# Altium PCB GATEWAY_PCB.PcbDoc (part 2 of 2)
Units mm, origin at the board's own origin, x right, y up, seen from the top; angles counter-clockwise.
Board outline 98.58 x 95.81 mm, 4 copper layers (SIGNAL_TOP, GND, POWER, SIGNAL_BOTTOM), stack 0.603 mm thick; 207 components, 120 nets, 669 pads, 510 vias.
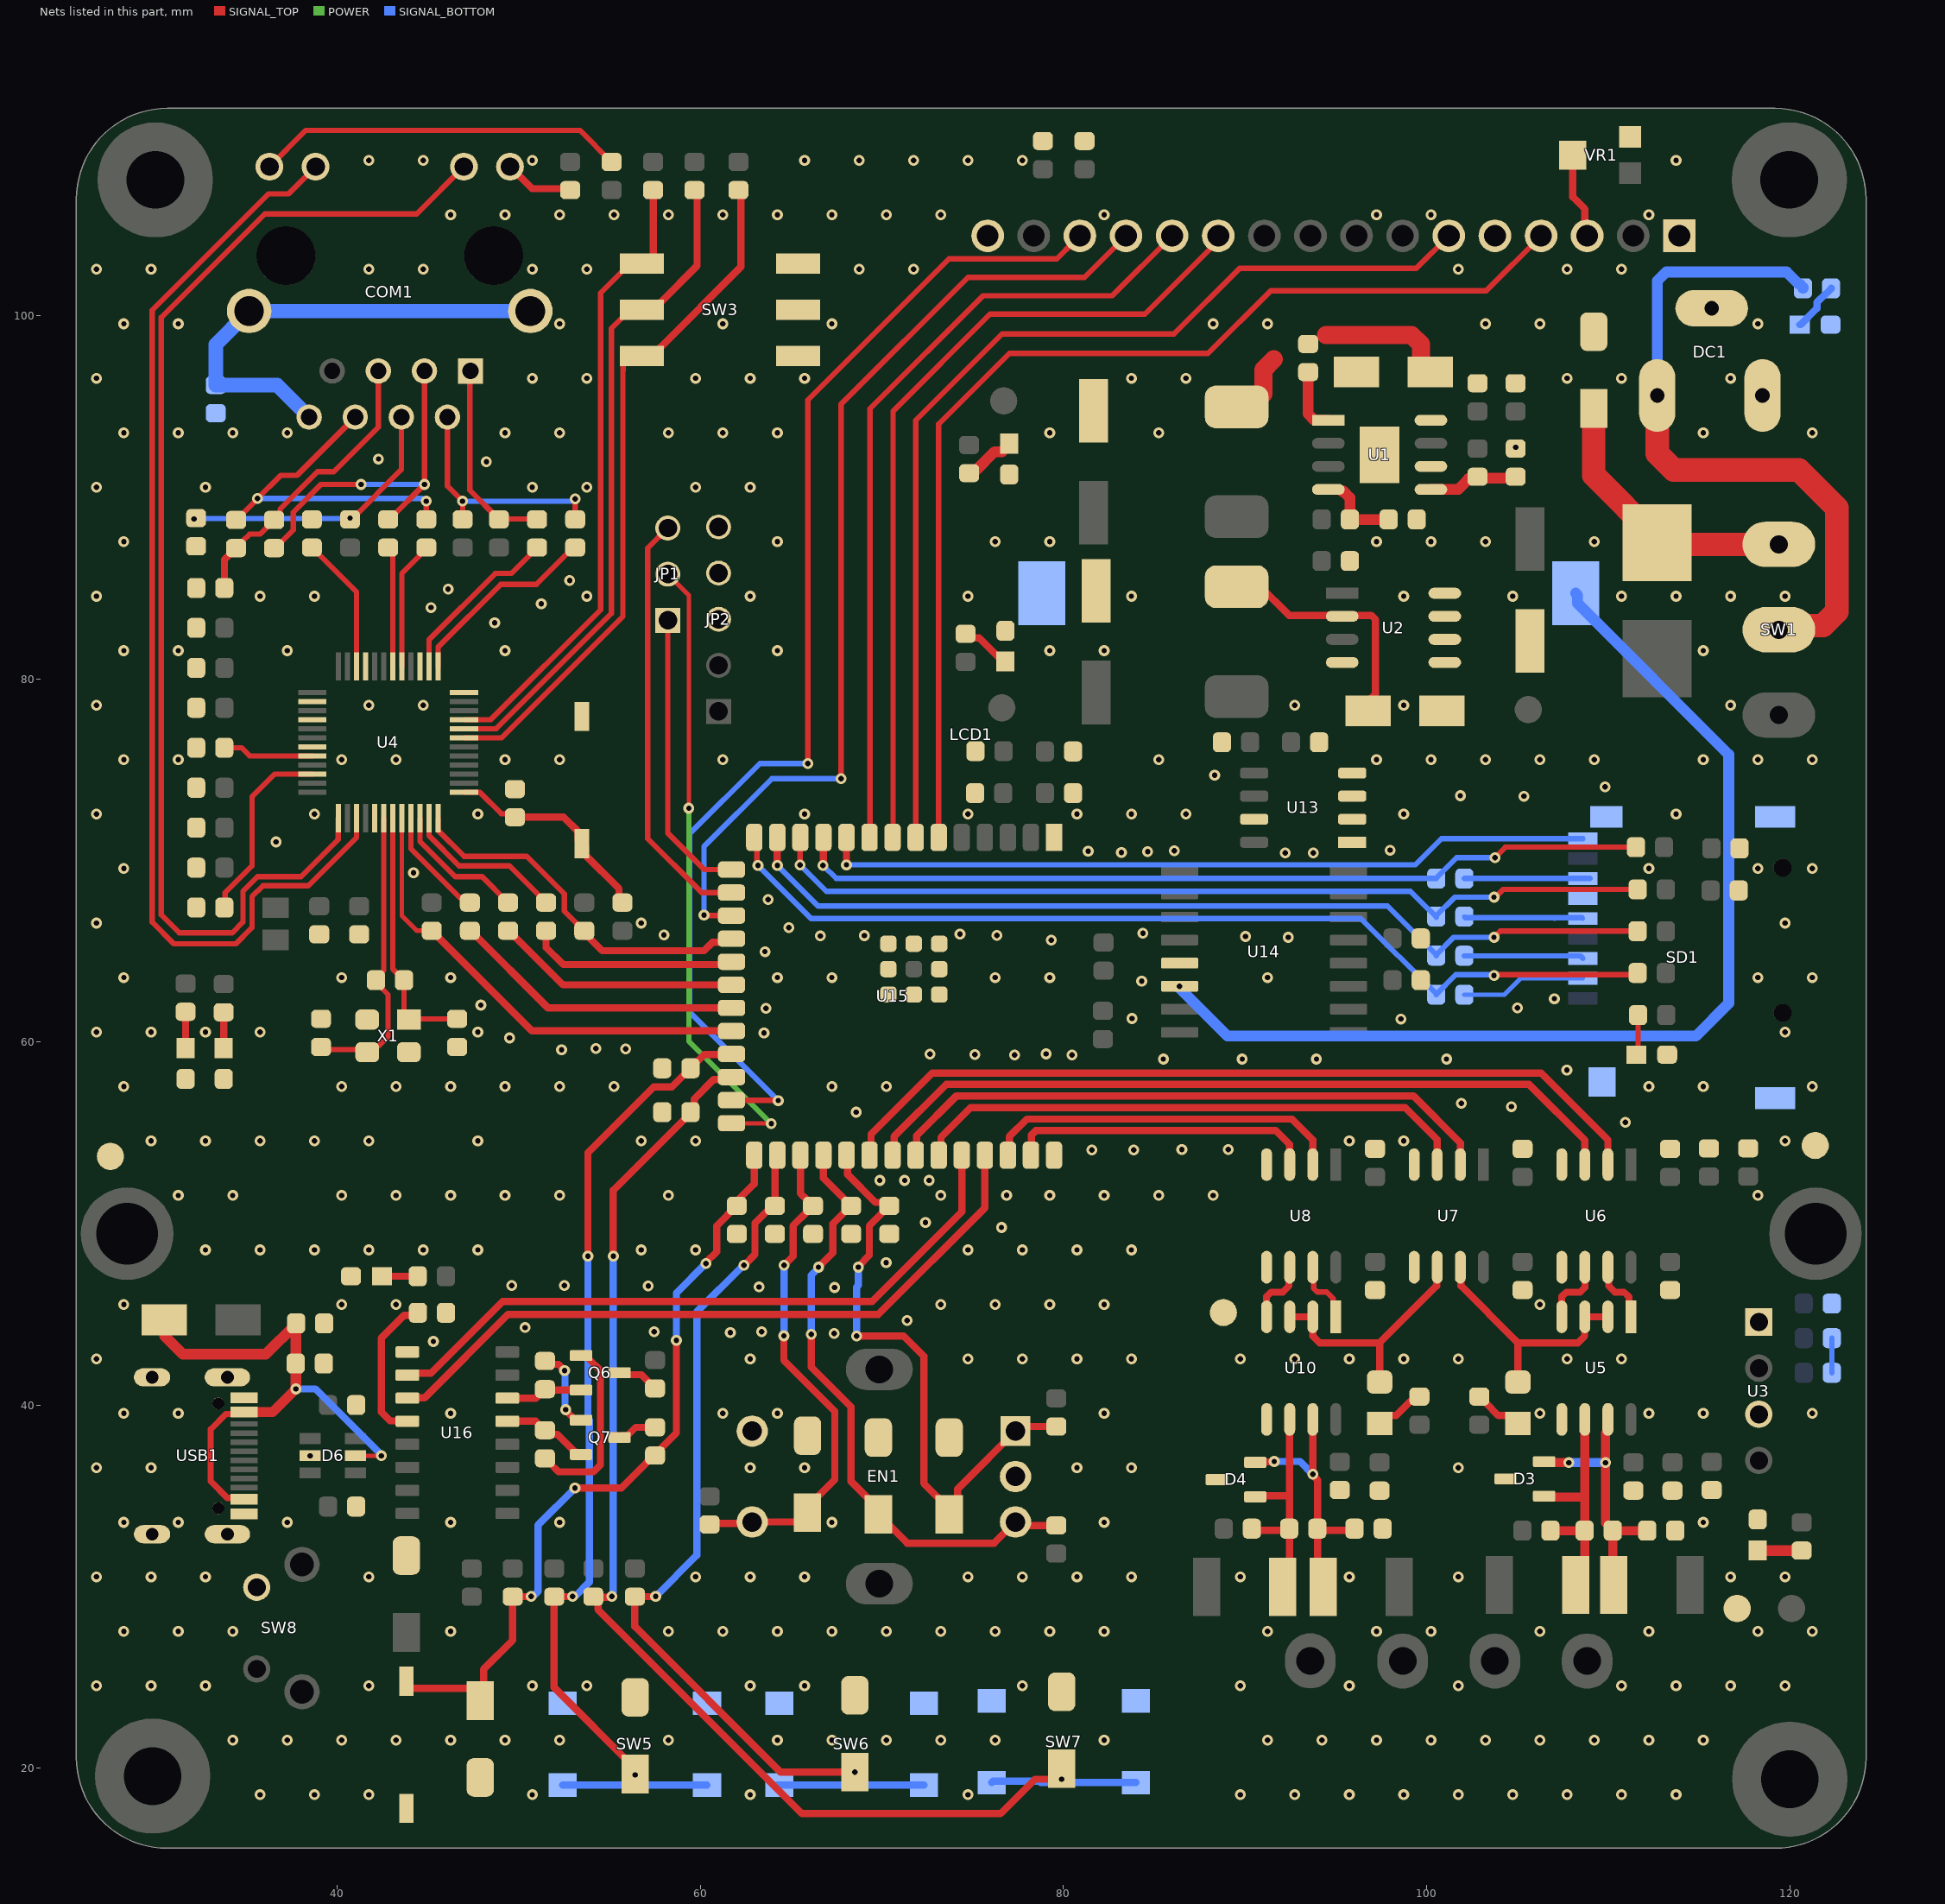
[diagram p4: the nets of this part, all layers, seen from the top]

## Via types
v1: diameter 0.6, hole 0.3, SIGNAL_TOP to SIGNAL_BOTTOM, tented both sides, 457 vias
v2: diameter 0.6, hole 0.3, SIGNAL_TOP to SIGNAL_BOTTOM, 53 vias

## Nets (pads, with @x,y where several pads share a name; then routed paths per layer and width w, separated by ;. In a path a pad name is that pad's centre, name@x,y a point inside that pad or via, vN(x,y) a via of type N, cw(c..) or ccw(c..) an arc to the next point about the centre after c; other vN are vias at no path point) (continued)
DEBUG_FLASH: C58.2 D15.C R80.1 R81.2 SW9.2 U15.27 | length 43
  SIGNAL_TOP w0.4: SW9.2@43.8,24.798 43.8,24.598 44,24.398 47.325,24.398 47.875,23.848 D15.C@47.875,23.726 48.05,23.901 48.05,25.45 49.657,27.057 R81.2@49.657,29.451 ; R81.2@49.831,29.458 50.667,29.458 v1(50.673,29.464) ; v1(53.086,35.433) 55.639,35.433 57.054,36.848 57.054,36.871 57.378,37.195 R80.1@57.401,37.195 ; R80.1@57.429,37.198 57.654,37.423 57.654,37.448 58.674,38.468 v1(58.674,43.561) ; v1(60.3,47.8) 60.3,47.854 60.9,48.454 60.9,49.875 C58.2@61.988,50.963 ; C58.2@62,50.975 C58.2@61.988,50.963 ; U15.27@62.962,53.761 62.962,52.18 61.867,51.085 C58.2@61.988,50.963
  SIGNAL_BOTTOM w0.4: v1@50.768,29.464 51.054,29.75 51.054,33.401 v1(53.086,35.433) ; v1(58.674,43.561) 58.674,46.174 v1(60.3,47.8)
DEBUG_RXD0: U15.37 U16.3 | length 39
  SIGNAL_TOP w0.4: U16.3@43.859,40.386 43.88,40.407 44.807,40.407 49.4,45 69.8,45 75.662,50.862 U15.37@75.662,53.761
DEBUG_TXD0: U15.36 U16.2 | length 37.4
  SIGNAL_TOP w0.4: U16.2@43.859,41.656 43.969,41.766 45.166,41.766 49.1,45.7 69.449,45.7 74.392,50.643 U15.36@74.392,53.761
DI1: U5.4 U6.6 | length 3.7
  SIGNAL_TOP w0.381: U5.4@107.442,44.862 107.442,45.974 107.696,46.228 108.458,46.228 108.712,46.482 U6.6@108.712,47.594
DI2: U8.6 U10.4 | length 3.6
  SIGNAL_TOP w0.381: U10.4@91.186,44.862 91.186,45.974 91.44,46.228 92.075,46.228 92.414,46.567 92.414,47.552 U8.6@92.456,47.594
DTR: Q7.2 R76.1 U16.13 | length 4.5
  SIGNAL_TOP w0.4: U16.13@49.359,39.116 50.923,39.116 51.185,38.854 51.185,38.846 R76.1@51.381,38.65 ; R76.1@51.435,38.621 51.66,38.396 52.116,38.396 53.108,37.404 Q7.2@53.169,37.404
EN1: LED6.2 U5.2 U5.3 U7.7 | length 13.8
  SIGNAL_TOP w0.4: U7.7@101.854,47.594 101.892,47.556 101.892,46.571 104.902,43.561 105.029,43.434 ; LED6.2@105.029,41.275 105.029,43.434 ; 109.312,44.862 U5.3@108.712,44.862 108.699,44.849 108.699,43.802 108.331,43.434 105.029,43.434 ; 109.347,44.862 U5.2@109.982,44.862
EN1_RS485: U7.2 U15.34 | length 34.2
  SIGNAL_TOP w0.4: U15.34@71.852,53.761 71.899,53.808 71.899,54.83 74.092,57.023 99.277,57.023 101.854,54.446 U7.2@101.854,53.244
EN2: LED7.2 U7.6 U10.2 U10.3 | length 13.8
  SIGNAL_TOP w0.4: U10.3@92.456,44.862 U10.2@93.726,44.862 93.739,44.849 93.739,43.802 94.107,43.434 97.409,43.434 ; LED7.2@97.409,41.275 97.409,43.434 ; U7.6@100.584,47.594 100.546,47.556 100.546,46.571 97.409,43.434
EN2_RS485: U7.3 U15.35 | length 31.2
  SIGNAL_TOP w0.4: U15.35@73.122,53.761 73.249,53.888 73.249,54.751 74.886,56.388 98.812,56.388 100.584,54.616 U7.3@100.584,53.244
ENC_CLK: C47.2 D13.C EN1.A R69.1 U15.31 | length 33.9
  SIGNAL_TOP w0.4: U15.31@68.042,53.761 68.099,53.704 68.099,52.701 69.636,51.164 70.211,51.164 C47.2@70.4,50.975 69.3,49.875 69.3,48.254 68.7,47.654 v1(68.7,47.6) ; v1(68.6,43.8) 71.2,43.8 72.3,42.7 72.3,35.695 73.7,34.295 D13.C@73.7,33.985 74.163,34.448 74.163,35.381 77.607,38.825 R69.1@79.6,38.825
  SIGNAL_BOTTOM w0.4: v1(68.6,43.8) 68.6,46.5 68.7,46.6 v1(68.7,47.6)
ENC_DATA: C48.2 D12.C EN1.B R70.1 U15.30 | length 33.9
  SIGNAL_TOP w0.4: v1(66.1,43.9) 66.1,42.1 68.3,39.9 68.3,35.795 69.8,34.295 D12.C@69.8,33.985 71.385,32.4 76.182,32.4 EN1.B@77.35,33.568 77.543,33.375 R70.1@79.6,33.375 ; v1(66.5,47.6) 67.3,48.4 67.3,50 68.275,50.975 C48.2@68.3,50.975 ; U15.30@66.772,53.761 66.772,52.503 67.95,51.325 67.95,51.302 C48.2@68.277,50.975
  SIGNAL_BOTTOM w0.4: v1(66.1,43.9) 66.1,47.146 66.5,47.546 v1(66.5,47.6)
ENC_SW: C46.2 D11.C EN1.E R68.1 U15.29 | length 28.5
  SIGNAL_TOP w0.4: R68.1@60.5,33.425 60.572,33.497 62.779,33.497 EN1.E@62.85,33.568 D11.C@65.883,33.568 ; v1(64.592,43.815) 64.592,42.467 67.4,39.659 67.4,35.895 65.9,34.395 D11.C@65.9,34.085 ; v1(64.6,47.7) 65.1,48.2 65.1,49.875 65.923,50.698 65.923,50.703 C46.2@66.195,50.975 ; U15.29@65.502,53.761 65.502,51.668 65.85,51.32 65.85,51.302 66.177,50.975 C46.2@66.195,50.975 ; D11.C@65.783,33.568 D11.C@66.2,33.985 ; C46.2@66.2,50.975 C46.2@66.195,50.975
  SIGNAL_BOTTOM w0.4: v1(64.592,43.815) 64.596,43.819 64.596,47.696 v1(64.6,47.7)
ETH_CLK: R14.2 U15.21 | length 16.2
  SIGNAL_TOP w0.4: R14.2@47.3,66.125 47.35,66.125 51.599,61.876 U15.21@61.712,61.876
ETH_CS: R10.1 U4.32 U15.22 | length 26.2
  SIGNAL_TOP w0.254: U4.32@43.55,72.32 43.55,66.95 44.375,66.125 R10.1@45.2,66.125
  SIGNAL_TOP w0.4: R10.1@45.2,66.125 45.223,66.125 45.55,65.798 45.55,65.775 50.719,60.606 U15.22@61.712,60.606
ETH_INT: R11.1 U4.36 U15.18 | length 20.7
  SIGNAL_TOP w0.295: U4.36@45.55,72.32 45.55,71.65 46.979,70.221 50.429,70.221 52.5,68.15 52.5,67.2 53.363,66.337 R11.1@53.363,66.125 ; R11.1@53.481,66.125 R11.1@53.6,66.125 ; R11.1@53.563,65.825 53.6,65.825 R11.1@53.613,65.825
  SIGNAL_TOP w0.4: R11.1@53.481,66.125 53.672,65.934 R11.1@53.782,65.825 ; R11.1@53.613,65.825 53.663,65.825 R11.1@53.782,65.825 ; U15.18@61.712,65.686 61.514,65.488 60.662,65.488 60.198,65.024 54.582,65.024 R11.1@53.782,65.825
ETH_MISO: R13.2 U15.20 | length 13.5
  SIGNAL_TOP w0.4: R13.2@49.4,66.125 49.45,66.125 52.429,63.146 U15.20@61.712,63.146
ETH_MOSI: R12.2 U15.19 | length 11.6
  SIGNAL_TOP w0.38: R12.2@51.5,66.125 51.5,65.2 52.438,64.262 61.558,64.262 U15.19@61.712,64.416
GND: C1.2 C2.2 C3.2 C4.2 C6.2 C7.2 C8.2 C9.1 C10.2 C11.2 C12.2 C13.2 C15.1 C16.1 C17.1 C18.1 C19.1 C20.1 C21.1 C22.1 C23.1 C24.1 C25.1 C26.1 C27.1 C28.1 C29.1 C30.1 C35.1 C36.1 C37.1 C38.1 C40.2 C42.1 C43.1 C44.1 C45.1 C46.1 C47.1 C48.1 C49.1 C50.1 C51.1 C54.1 C55.1 C56.1 C57.1 C58.1 C59.2 C61.2 C63.1 C64.1 D1.1 D2.1 D6.2 D7.A D9.A D10.A D11.A D12.A D13.A D14.A D15.A D16.A DC1.2 DC1.3 EN1.C EN1.D JP2.03 JP2.04 JP2.05 LCD1.1 LCD1.5 LCD1.16 LED1.2 LED2.2 LED3.2 LED4.2 LED5.2 LED12.2 LED15.2 R6.2 R7.2 R15.1 R82.2 R83.2 SD1.6 SD1.G1 SD1.G2 SD1.G3 SD1.G4 SW2.1 SW3.1_1 SW3.2_1 SW3.3_1 SW5.1 SW6.1 SW7.1 SW8.1 SW9.1 TP1.1 TP2.1 U1.6 U1.9 U2.4 U2.5 U2.6 U2.7 U2.8 U3.1 U4.3 U4.9 U4.14 U4.16 U4.19 U4.29 U4.48 U6.4 U7.4 U8.4 U13.1 U13.2 U13.3 U13.4 U13.7 U14.13 U15.1 U15.40 U15.41_1 U15.41_2 U15.41_3 U15.41_4 U15.41_6 U15.41_7 U15.41_8 U15.41_9 U16.1 USB1.A1 USB1.B1 USB1.SHIELD VBAT1.N VR1.3 X1.2 X1.4 | length 2.1
  SIGNAL_TOP w0.295: C56.1@75.025,73.7 C56.1@75.125,73.7 ; R6.2@104.9,92.675 v1(104.9,92.75)
  SIGNAL_BOTTOM w0.295: C13.2@122.314,41.783 C4.2@122.314,43.688
  other v1: 35.737,18.547 38.737,18.547 41.737,18.547 50.737,18.547 62.737,18.547 74.737,18.547 34.237,21.547 37.237,21.547 40.237,21.547 43.237,21.547 46.237,21.547 49.237,21.547 52.237,21.547 58.237,21.547 64.237,21.547 67.237,21.547 70.237,21.547 73.237,21.547 76.237,21.547 82.237,21.547 26.737,24.547 29.737,24.547 32.737,24.547 41.737,24.547 50.737,24.547 53.737,24.547 62.737,24.547 65.737,24.547 77.737,24.547 28.237,27.547 31.237,27.547 34.237,27.547 46.237,27.547 58.237,27.547 61.237,27.547 64.237,27.547 67.237,27.547 70.237,27.547 73.237,27.547 76.237,27.547 79.237,27.547 82.237,27.547 26.737,30.547 29.737,30.547 32.737,30.547 41.737,30.547 59.737,30.547 62.737,30.547 65.737,30.547 74.737,30.547 77.737,30.547 80.737,30.547 83.737,30.547 28.237,33.547 31.237,33.547 37.237,33.547 46.237,33.547 52.237,33.547 67.237,33.547 82.237,33.547 26.737,36.547 29.737,36.547 62.737,36.547 65.737,36.547 80.737,36.547 83.737,36.547 38.501,37.211 28.237,39.547 31.237,39.547 46.237,39.547 61.237,39.547 64.237,39.547 82.237,39.547 26.737,42.547 62.737,42.547 74.737,42.547 77.737,42.547 80.737,42.547 83.737,42.547 45.288,43.51 67.361,43.942 61.646,43.993 57.455,44.044 63.373,44.044 50.343,44.272 71.388,44.664 28.237,45.547 40.237,45.547 43.237,45.547 73.237,45.547 76.237,45.547 79.237,45.547 82.237,45.547 67.386,46.482 63.221,46.507 57.125,46.558 49.606,46.584 52.502,46.584 70.231,47.854 32.737,48.547 35.737,48.547 38.737,48.547 41.737,48.547 44.737,48.547 47.737,48.547 56.737,48.547 59.737,48.547 74.737,48.547 77.737,48.547 80.737,48.547 83.737,48.547 76.581,49.784 72.39,50.063 31.237,51.547 34.237,51.547 40.237,51.547 43.237,51.547 46.237,51.547 49.237,51.547 52.237,51.547 58.237,51.547 73.237,51.547 79.237,51.547 82.237,51.547 85.237,51.547 88.237,51.547 118.237,51.547 76.86,51.562 69.875,52.375 71.247,52.375 72.593,52.375 81.559,54.051 83.871,54.051 86.512,54.077 89.078,54.077 29.737,54.547 32.737,54.547 35.737,54.547 38.737,54.547 41.737,54.547 47.737,54.547 56.737,54.547 59.737,54.547 95.737,54.547 98.737,54.547 119.737,54.547 110.947,55.575 68.58,56.134 104.673,56.439 101.905,56.617 28.237,57.547 40.237,57.547 43.237,57.547 46.237,57.547 49.237,57.547 52.237,57.547 55.237,57.547 67.237,57.547 70.237,57.547 112.237,57.547 115.237,57.547 121.237,57.547 107.721,58.445 85.496,59.055 89.84,59.055 93.929,59.055 101.092,59.055 77.295,59.286 80.467,59.284 75.108,59.309 72.644,59.334 79.036,59.343 52.349,59.563 55.88,59.614 54.239,59.644 49.479,60.223 63.5,60.503 26.737,60.547 29.737,60.547 32.737,60.547 35.737,60.547 47.737,60.547 119.737,60.547 98.577,61.265 83.769,61.29 63.602,61.849 105.004,61.874 47.904,62.027 107.036,62.382 84.303,63.348 28.237,63.547 40.237,63.547 46.237,63.547 64.237,63.547 67.237,63.547 76.237,63.547 79.237,63.547 91.237,63.547 118.237,63.547 121.237,63.547 63.551,64.973 79.324,65.608 92.38,65.761 90.018,65.811 66.599,65.837 69.033,65.858 76.327,65.862 57.988,65.888 74.295,65.938 84.372,65.989 64.872,66.294 26.737,66.547 56.737,66.547 119.737,66.547 63.729,67.843 44.196,69.317 28.237,69.547 112.237,69.547 118.237,69.547 121.237,69.547 92.202,70.409 93.751,70.409 83.185,70.434 84.633,70.485 81.356,70.51 86.106,70.536 97.993,70.561 36.627,71.018 26.737,72.547 38.737,72.547 47.737,72.547 65.737,72.547 74.737,72.547 80.737,72.547 83.737,72.547 86.737,72.547 98.737,72.547 113.737,72.547 105.359,73.533 101.854,73.558 109.83,74.041 88.321,74.695 28.237,75.547 31.237,75.547 40.237,75.547 43.237,75.547 49.237,75.547 52.237,75.547 61.237,75.547 85.237,75.547 97.237,75.547 100.237,75.547 103.237,75.547 106.237,75.547 109.237,75.547 115.237,75.547 118.237,75.547 121.237,75.547 26.737,78.547 41.737,78.547 44.737,78.547 92.737,78.547 98.737,78.547 116.737,78.547 28.237,81.547 31.237,81.547 37.237,81.547 49.237,81.547 64.237,81.547 79.237,81.547 82.237,81.547 115.237,81.547 48.666,83.083 45.161,83.922 51.232,84.125 26.737,84.547 35.737,84.547 38.737,84.547 53.737,84.547 62.737,84.547 74.737,84.547 83.737,84.547 98.737,84.547 104.737,84.547 110.737,84.547 113.737,84.547 116.737,84.547 119.737,84.547 46.101,84.938 52.798,85.417 28.237,87.547 64.237,87.547 76.237,87.547 79.237,87.547 97.237,87.547 100.237,87.547 103.237,87.547 109.237,87.547 26.737,90.547 32.737,90.547 50.737,90.547 53.737,90.547 59.737,90.547 62.737,90.547 48.209,91.948 42.266,92.1 28.237,93.547 31.237,93.547 34.237,93.547 37.237,93.547 49.237,93.547 52.237,93.547 58.237,93.547 61.237,93.547 64.237,93.547 79.237,93.547 85.237,93.547 115.237,93.547 121.237,93.547 26.737,96.547 50.737,96.547 53.737,96.547 59.737,96.547 62.737,96.547 65.737,96.547 83.737,96.547 86.737,96.547 107.737,96.547 110.737,96.547 116.737,96.547 28.237,99.547 31.237,99.547 52.237,99.547 61.237,99.547 67.237,99.547 88.237,99.547 91.237,99.547 103.237,99.547 106.237,99.547 118.237,99.547 26.737,102.547 29.737,102.547 41.737,102.547 44.737,102.547 50.737,102.547 53.737,102.547 68.737,102.547 71.737,102.547 101.737,102.547 107.737,102.547 110.737,102.547 46.237,105.547 49.237,105.547 52.237,105.547 55.237,105.547 58.237,105.547 61.237,105.547 64.237,105.547 67.237,105.547 70.237,105.547 73.237,105.547 82.237,105.547 97.237,105.547 100.237,105.547 112.237,105.547 41.737,108.547 44.737,108.547 50.737,108.547 65.737,108.547 68.737,108.547 71.737,108.547 74.737,108.547 77.737,108.547 113.737,108.547
GND_RJ45: C15.2 COM1.8 COM1.15 COM1.16 | length 26.4
  SIGNAL_BOTTOM w0.8: COM1.8@38.445,94.41 36.68,96.175 33.45,96.175 33.4,96.225 33.4,96.275 C15.2@33.3,96.175 33.3,98.41 35.03,100.14 35.14,100.14 COM1.16@35.14,100.25 COM1.15@50.63,100.25
GND_RS485: C14.2 C31.2 C32.2 C33.2 C34.2 C41.2 C60.2 C62.2 D3.3 D4.3 LED11.2 R33.2 R44.2 TP3.1 TP10.1 U3.3 U5.5 U6.5 U7.5 U8.5 U10.5 | length 0.1
  SIGNAL_TOP w0.381: R44.2@97.575,33.2 R44.2@97.65,33.2
  other v1: 89.737,18.547 92.737,18.547 95.737,18.547 98.737,18.547 101.737,18.547 104.737,18.547 107.737,18.547 110.737,18.547 113.737,18.547 91.237,21.547 94.237,21.547 97.237,21.547 100.237,21.547 103.237,21.547 106.237,21.547 109.237,21.547 112.237,21.547 115.237,21.547 89.737,24.547 95.737,24.547 101.737,24.547 110.737,24.547 113.737,24.547 116.737,24.547 119.737,24.547 91.237,27.547 97.237,27.547 100.237,27.547 106.237,27.547 112.237,27.547 118.237,27.547 121.237,27.547 89.737,30.547 95.737,30.547 101.737,30.547 116.737,30.547 119.737,30.547 115.237,33.547 101.737,36.547 106.237,39.547 112.237,39.547 115.237,39.547 121.237,39.547 89.737,42.547 92.737,42.547 95.737,42.547 98.737,42.547 101.737,42.547 107.737,42.547 110.737,42.547 106.237,45.547
IO3: JP1.01 U15.15 | length 16.1
  SIGNAL_TOP w0.3: JP1.01@58.2,83.22 58.2,71.5 60.204,69.496 U15.15@61.712,69.496
IO45: JP1.02 U15.26 | length 34.9
  SIGNAL_TOP w0.25: JP1.02@58.2,85.76 59.36,84.6 v2(59.36,72.873) ; U15.26@61.712,55.526 61.725,55.513 63.887,55.513 v2(63.9,55.5)
  POWER w0.25: JP1.02@58.2,85.76 JP1.02@58.2,85.8
  POWER w0.3: v2(59.36,72.873) 59.36,60.04 v2(63.9,55.5)
IO46: JP1.03 U15.16 | length 23.4
  SIGNAL_TOP w0.3: JP1.03@58.2,88.3 57.1,87.2 57.1,71.2 59.901,68.399 60.074,68.226 U15.16@61.712,68.226
LCD_D6: LCD1.13 U15.17 | length 54.6
  SIGNAL_TOP w0.3: v2(60.198,66.98) 60.21,66.968 61.7,66.968 U15.17@61.712,66.956 ; v2(67.742,74.498) 67.742,95.123 74.727,102.108 81.153,102.108 LCD1.13@83.439,104.394
  SIGNAL_BOTTOM w0.3: v2(60.198,66.98) 60.198,70.764 63.932,74.498 v2(67.742,74.498)
LCD_D7: LCD1.14 U15.25 | length 66.4
  SIGNAL_TOP w0.3: U15.25@61.712,56.796 61.725,56.783 64.272,56.783 v2(64.284,56.771) ; v2(65.913,75.336) 65.913,95.352 73.685,103.124 79.629,103.124 80.594,104.089 80.899,104.089 LCD1.14@80.899,104.394
  SIGNAL_BOTTOM w0.3: v2(64.284,56.771) 59.411,61.645 59.411,71.476 63.271,75.336 65.86,75.336 65.913,75.283 v2(65.913,75.336)
LCD_EN: LCD1.6 U15.7 | length 56.5
  SIGNAL_TOP w0.3: U15.7@71.852,71.261 71.852,94.229 76.606,98.984 86.084,98.984 89.7,102.6 99.425,102.6 LCD1.6@101.219,104.394
LED1: COM1.11 U4.27 | length 62.2
  SIGNAL_TOP w0.295: COM1.11@38.8,108.2 37.3,106.7 36.2,106.7 29.8,100.3 29.8,66.6 31,65.4 34.4,65.4 35.3,66.3 35.3,68 35.9,68.6 38.4,68.6 41.05,71.25 U4.27@41.05,72.32
LED2: COM1.10 U4.25 | length 67.5
  SIGNAL_TOP w0.295: U4.25@40.05,72.32 40.05,71.15 38,69.1 35.6,69.1 34.8,68.3 34.8,66.6 34.214,66.014 31.286,66.014 30.3,67 30.3,99.9 36,105.6 44.37,105.6 COM1.10@46.97,108.2
NetC5_1: C5.1 U1.1 | length 3.6
  SIGNAL_TOP w0.6: C5.1@93.472,96.904 93.472,94.585 93.823,94.234 U1.1@94.584,94.234
NetC5_2: C5.2 D2.2 L1.1 U1.8 | length 10.6
  SIGNAL_TOP w1: L1.1@89.941,95.024 90.323,95.024 90.998,95.699 90.998,97.014 91.583,97.6 ; 94.465,98.934 99.171,98.934 99.688,98.417 99.688,97.251 100.038,96.901 D2.2@100.077,96.901
NetC24_2: C24.2 U4.22 | length 10.6
  SIGNAL_TOP w0.295: C24.2@33.775,67.4 33.82,67.445 33.82,68.22 35.3,69.7 35.3,73.5 36.55,74.75 U4.22@38.62,74.75
NetC25_2: C25.2 U4.20 | length 5
  SIGNAL_TOP w0.295: C25.2@33.78,76.2 34.718,76.2 35.168,75.75 U4.20@38.62,75.75
NetC26_2: C26.2 COM1.5 R20.1 R21.1 | length 16.3
  SIGNAL_TOP w0.295: R20.1@34.401,87.194 34.414,87.194 34.821,87.602 34.821,87.615 35.173,87.966 35.741,87.966 36.851,89.077 36.851,89.351 38.9,91.4 39.8,91.4 42.255,93.855 COM1.5@42.255,96.95
  SIGNAL_TOP w0.38: C26.2@33.775,85 33.775,86.568 R20.1@34.401,87.194
NetC27_2: C27.2 COM1.4 R19.2 | length 15.8
  SIGNAL_TOP w0.295: v2(32.1,88.8) 32.174,88.8 C27.2@32.219,88.844 ; R19.2@40.677,88.77 40.677,88.827 v2(40.7,88.85) ; R19.2@40.7,88.775 40.782,88.775 43.525,91.518 43.525,94.325 COM1.4@43.61,94.41
  SIGNAL_TOP w0.4: COM1.4@43.525,94.41 COM1.4@43.61,94.41
  SIGNAL_BOTTOM w0.295: v2(32.1,88.8) 32.125,88.825 40.675,88.825 v2(40.7,88.85)
NetC44_2: C44.2 D9.C R65.1 SW5.2 U15.23 | length 57
  SIGNAL_TOP w0.4: R65.1@51.924,29.458 52.953,29.458 v1(52.959,29.464) ; R65.1@52.07,29.451 51.925,29.451 51.701,29.227 51.871,29.227 51.943,29.155 51.943,24.452 56.4,19.995 v2(56.4,19.635) ; v1(53.8,48.2) 53.8,53.9 57.431,57.531 58.433,57.531 59.099,58.197 59.122,58.197 59.449,58.524 C44.2@59.449,58.547 ; C44.2@59.449,58.57 59.776,58.897 59.799,58.897 60.211,59.309 U15.23@62.098,59.309
  SIGNAL_BOTTOM w0.4: SW5.2@52.413,19.086 56.4,19.086 ; v1@53.086,29.464 53.875,30.253 53.875,39.162 53.8,39.237 v1(53.8,48.2) ; v2(56.4,19.635) 56.4,19.086 ; SW5.2@60.363,19.086 56.4,19.086
NetC45_2: C45.2 D10.C R66.1 SW6.2 U15.28 | length 54.2
  SIGNAL_TOP w0.4: v1(57.531,29.464) 57.525,29.458 56.394,29.458 R66.1@56.388,29.451 56.388,27.812 64.415,19.785 v2(68.5,19.785) ; v1(62.4,47.7) 63,48.3 63,50.027 C45.2@64.087,51.114 ; C45.2@64.1,50.975 64.1,53.629 U15.28@64.232,53.761
  SIGNAL_BOTTOM w0.4: v1(57.531,29.464) 59.8,31.733 59.8,45.138 62.362,47.7 v1(62.4,47.7) ; SW6.2@64.226,19.086 68.486,19.086 ; v2(68.5,19.785) 68.5,19.1 68.486,19.086 ; SW6.2@72.301,19.086 68.486,19.086
NetC49_2: C49.2 D14.C R72.2 SW7.2 U15.24 | length 73.6
  SIGNAL_TOP w0.4: R72.2@54.445,29.426 55.08,29.426 v1(55.118,29.464) ; R72.2@54.445,29.464 54.115,29.464 R72.2@54.102,29.451 54.352,29.201 54.352,28.748 65.6,17.5 76.525,17.5 78.425,19.4 v2(79.9,19.4) D14.C@79.9,19.985 ; v1(55.2,48.2) 55.2,51.835 59.449,56.084 C49.2@59.449,56.157 ; C49.2@59.449,56.134 59.668,56.353 59.668,56.868 60.731,57.931 61.522,57.931 U15.24@61.885,58.293
  SIGNAL_BOTTOM w0.4: v1(55.118,29.464) 55.156,29.502 55.156,29.644 55.2,29.687 v1(55.2,48.2) ; SW7.2@76.035,19.213 76.122,19.3 78.654,19.3 78.741,19.213 SW7.2@83.985,19.213
NetC57_2: C57.2 U16.4 | length 9
  SIGNAL_TOP w0.4: U16.4@43.859,39.116 43.841,39.134 42.908,39.134 42.418,39.624 42.418,43.688 43.684,44.954 44.306,44.954 C57.2@44.437,45.085 44.737,45.385 44.712,45.385 C57.2@44.535,45.208
NetCOM1_1: COM1.1 R17.1 R24.2 | length 11
  SIGNAL_TOP w0.3: COM1.1@47.335,96.95 47.335,96.835 47.3,96.8 47.3,90.375 R17.1@48.9,88.775 48.925,88.8 50.975,88.8 R24.2@51,88.775
NetCOM1_2: COM1.2 R16.1 R23.2 | length 13.4
  SIGNAL_TOP w0.295: COM1.2@46.065,94.41 46.065,90.613 v2(46.9,89.778) R16.1@46.9,88.775 ; R23.2@53.1,88.775 v2(53.1,89.9)
  SIGNAL_BOTTOM w0.295: v2(46.9,89.778) 52.895,89.778 53.017,89.9 v2(53.1,89.9)
NetCOM1_3: COM1.3 R21.2 R22.2 | length 19.4
  SIGNAL_TOP w0.3: R21.2@36.538,87.439 36.519,87.42 R21.2@36.519,87.194 36.569,87.194 37.575,88.2 37.575,89.175 39.1,90.7 v2(41.3,90.7) ; R22.2@42.928,88.853 42.94,88.853 44.787,90.7 v2(44.8,90.7) 44.797,90.702 44.797,96.798 COM1.3@44.8,96.8
  SIGNAL_TOP w0.4: COM1.3@44.795,96.95 44.795,96.805 COM1.3@44.8,96.8
  SIGNAL_BOTTOM w0.3: v2(41.3,90.7) v2(44.8,90.7)
NetCOM1_6: COM1.6 R18.2 R20.2 | length 19.3
  SIGNAL_TOP w0.3: R20.2@34.419,88.744 34.444,88.744 35.6,89.901 v2(35.6,89.925) 36.875,91.2 37.775,91.2 COM1.6@40.985,94.41 ; R18.2@44.9,88.775 v2(44.9,89.778)
  SIGNAL_BOTTOM w0.3: v2(35.6,89.925) 44.671,89.925 44.819,89.778 v2(44.9,89.778)
NetCOM1_9: COM1.9 R25.2 | length 3.8
  SIGNAL_TOP w0.4: COM1.9@49.51,108.2 50.724,106.986 52.744,106.986 R25.2@52.82,106.909
NetCOM1_12: COM1.12 R32.2 | length 20.4
  SIGNAL_TOP w0.295: COM1.12@36.26,108.2 38.259,110.199 53.367,110.199 R32.2@55.106,108.459
NetD1_2: D1.2 L2.1 U2.2 | length 12.4
  SIGNAL_TOP w0.4: L2.1@90.195,85.141 90.77,85.141 92.421,83.49 94.554,83.49 94.566,83.477 95.333,83.477 95.346,83.49 95.359,83.477 96.126,83.477 96.138,83.49 96.946,83.49 97.18,83.255 97.18,79.172 D1.2@96.799,78.791
NetD3_1: D3.1 F2.1 R38.1 R39.2 U5.6 | length 13
  SIGNAL_TOP w0.5: D3.1@106.172,34.93 108.567,34.93 108.699,34.798 ; R39.2@106.82,33.089 R38.1@108.699,33.089 108.699,30.81 F2.1@108.204,30.315 ; R38.1@108.699,33.099 108.699,34.798 ; U5.6@108.699,38.629 108.699,34.798
NetD3_2: D3.2 F1.1 R33.1 R38.2 U5.7 | length 14.9
  SIGNAL_TOP w0.5: D3.2@106.172,36.83 v2(107.823,36.83) ; U5.7@109.936,39.392 109.963,39.365 109.963,38.566 109.855,38.458 v2(109.855,36.83) 109.855,33.508 110.249,33.114 R38.2@110.249,33.089 ; F1.1@110.295,30.315 110.249,30.361 R38.2@110.249,33.089 ; R33.1@112.141,33.089 R38.2@110.249,33.089
  SIGNAL_BOTTOM w0.5: v2(107.823,36.83) v2(109.855,36.83)
NetD4_1: D4.1 F4.1 R49.1 R50.2 U10.6 | length 13.4
  SIGNAL_TOP w0.4: D4.1@90.215,35 92.443,35 ; R50.2@90.437,33.109 R49.1@92.443,33.109 ; F4.1@92.075,30.188 92.443,30.556 R49.1@92.443,33.109 ; U10.6@92.443,39.199 92.443,35 ; R49.1@92.443,33.109 92.443,35
NetD4_2: D4.2 F3.1 R44.1 R49.2 U10.7 | length 14.6
  SIGNAL_TOP w0.4: D4.2@90.62,36.75 90.745,36.875 91.575,36.875 v2(91.6,36.9) ; U10.7@93.726,39.083 v2(93.726,36.195) 93.726,36.141 93.993,35.874 R49.2@93.993,33.109 ; F3.1@94.293,30.188 93.993,30.488 R49.2@93.993,33.109 ; R44.1@95.999,33.109 95.987,33.097 94.803,33.097 94.791,33.109 R49.2@93.993,33.109
  SIGNAL_BOTTOM w0.4: v2(91.6,36.9) 93.021,36.9 v2(93.726,36.195)
NetD7_C: D7.C Fuse1.1 SW1.1 | length 15.6
  SIGNAL_TOP w1.3: D7.C@109.2,94.885 109.2,91.204 112.7,87.704 Fuse1.1@112.7,87.488 112.788,87.4 SW1.1@119.4,87.4
NetLCD1_4: LCD1.4 U15.6 | length 60.2
  SIGNAL_TOP w0.3: U15.6@73.122,71.261 73.122,94.026 77.013,97.917 87.96,97.917 91.415,101.371 103.276,101.371 LCD1.4@106.299,104.394
NetLCD1_11: LCD1.11 U15.8 | length 45.6
  SIGNAL_TOP w0.3: U15.8@70.582,71.261 70.582,71.344 70.612,71.374 70.612,94.742 75.946,100.076 84.476,100.076 88.519,104.119 LCD1.11@88.519,104.394
NetLCD1_12: LCD1.12 U15.9 | length 44.2
  SIGNAL_TOP w0.3: U15.9@69.312,71.261 69.342,71.291 69.342,94.869 75.565,101.092 82.677,101.092 LCD1.12@85.979,104.394
NetLED1_1: LED1.1 R1.2 | length 2.8
  SIGNAL_BOTTOM w0.4: LED1.1@120.548,99.499 120.598,99.499 121.497,100.397 121.497,100.722 121.956,101.181 121.979,101.181 122.275,101.477 R1.2@122.275,101.5
NetLED2_1: LED2.1 R2.2 | length 2.6
  SIGNAL_TOP w0.6: R2.2@74.8,91.325 74.925,91.45 75.15,91.45 76.202,92.502 76.601,92.502 76.801,92.702 LED2.1@76.801,92.752
NetLED3_1: LED3.1 R3.2 | length 3.1
  SIGNAL_TOP w0.4: R3.2@74.5,82.475 74.717,82.258 75.341,82.258 76.7,80.899 76.7,80.8 76.602,80.898 LED3.1@76.602,80.947
NetLED4_1: LED4.1 R8.2 | length 2
  SIGNAL_TOP w0.4: LED4.1@31.642,59.662 R8.2@31.641,61.659
NetLED5_1: LED5.1 R9.2 | length 2
  SIGNAL_TOP w0.4: LED5.1@33.742,59.662 R9.2@33.74,61.635
NetLED6_1: LED6.1 R34.2 | length 2.8
  SIGNAL_TOP w0.4: R34.2@102.9,40.475 102.923,40.475 103.25,40.148 103.25,40.125 103.951,39.424 104.594,39.424 LED6.1@105.029,38.989
NetLED7_1: LED7.1 R35.2 | length 2.8
  SIGNAL_TOP w0.4: LED7.1@97.409,38.989 97.844,39.424 98.314,39.424 99.096,40.206 99.331,40.206 R35.2@99.6,40.475
NetLED11_1: LED11.1 R56.2 | length 2.4
  SIGNAL_TOP w0.6: LED11.1@118.237,32.004 118.243,31.998 120.644,31.998 R56.2@120.65,31.991
NetLED12_1: LED12.1 R61.2 | length 2.2
  SIGNAL_TOP w0.3: LED12.1@111.548,59.301 111.647,59.4 R61.2@111.647,61.478
NetLED15_1: LED15.1 R78.2 | length 2.2
  SIGNAL_TOP w0.4: LED15.1@42.452,47.099 R78.2@44.661,47.099
NetQ6_1: Q6.1 R76.2 | length 10.2
  SIGNAL_TOP w0.38: R76.2@51.435,37.071 51.46,37.071 51.695,36.836 51.695,36.811 52.184,36.322 54.102,36.322 54.483,36.703 54.483,41.91 53.848,42.545 53.848,42.623 53.738,42.733 Q6.1@53.423,42.733
NetQ6_3: Q6.3 R75.2 | length 2.3
  SIGNAL_TOP w0.38: Q6.3@55.543,41.783 55.643,41.683 56.742,41.683 57.177,41.248 57.177,41.23 57.482,40.925 R75.2@57.5,40.925
NetQ7_1: Q7.1 R79.2 | length 4.5
  SIGNAL_TOP w0.381: R79.2@51.562,42.431 51.562,42.384 51.695,42.252 52.177,42.252 v1(52.519,41.91) ; v1(52.578,39.751) 52.578,39.707 53.108,39.177 Q7.1@53.423,39.177
  SIGNAL_BOTTOM w0.381: v1(52.519,41.91) 52.548,41.88 52.548,39.781 v1(52.578,39.751)
NetQ7_3: Q7.3 R80.2 | length 2.3
  SIGNAL_TOP w0.38: Q7.3@55.289,38.354 Q7.3@55.399,38.244 ; Q7.3@55.543,38.227 55.653,38.337 55.99,38.337 56.428,38.775 R80.2@57.5,38.775
NetR4_2: R4.2 R6.1 U1.5 | length 4.6
  SIGNAL_TOP w0.6: U1.5@100.234,90.424 101.74,90.424 102.212,90.896 102.212,90.921 102.337,91.046 102.362,91.046 R6.1@104.521,91.046
NetR5_2: R5.2 R7.1 U1.4 | length 4
  SIGNAL_TOP w0.6: U1.4@95.346,90.322 95.42,90.322 95.771,89.971 R5.2@95.771,88.826 ; R5.2@95.771,88.773 R7.1@98.031,88.773
NetR12_1: R12.1 U4.35 | length 8.9
  SIGNAL_TOP w0.295: U4.35@45.05,72.32 45.05,71.35 46.7,69.7 49.475,69.7 R12.1@51.5,67.675
NetR13_1: R13.1 U4.34 | length 7.5
  SIGNAL_TOP w0.295: U4.34@44.55,72.32 44.55,71.05 46.5,69.1 47.975,69.1 R13.1@49.4,67.675
NetR14_1: R14.1 U4.33 | length 6.2
  SIGNAL_TOP w0.295: U4.33@44.05,72.32 44.05,70.65 46.736,67.964 47.011,67.964 R14.1@47.3,67.675
NetR15_2: R15.2 U4.10 | length 7.5
  SIGNAL_TOP w0.295: R15.2@38.65,87.187 41.05,84.787 U4.10@41.05,80.68
NetR41_2: R41.2 R42.2 U15.12 | length 49.5
  SIGNAL_TOP w0.3: v2(65.481,69.748) 65.492,69.759 65.492,71.251 U15.12@65.502,71.261 ; v2(103.708,67.97) 103.789,67.97 104.219,68.4 R41.2@111.625,68.4
  SIGNAL_BOTTOM w0.3: v2(65.481,69.748) 66.93,68.3 99.1,68.3 100.1,67.3 100.121,67.3 R42.2@100.523,66.898 ; R42.2@100.531,66.869 100.531,66.956 101.545,67.97 v2(103.708,67.97)
NetR42_1: R42.1 SD1.5 | length 6.6
  SIGNAL_BOTTOM w0.25: R42.1@102.075,66.9 R42.1@102.125,66.85 ; 107.05,66.8 107.1,66.85 ; SD1.5@108.55,66.85 SD1.5@108.6,66.8
  SIGNAL_BOTTOM w0.3: R42.1@102.125,66.85 107.1,66.85 SD1.5@108.55,66.85
NetR43_1: R43.1 SD1.3 | length 6.6
  SIGNAL_BOTTOM w0.3: R43.1@102.082,64.743 108.457,64.743 SD1.3@108.6,64.6
NetR45_1: R45.1 SD1.7 | length 6.9
  SIGNAL_BOTTOM w0.3: R45.1@102.075,69 105.538,69 SD1.7@109.001,69
NetR46_1: R46.1 SD1.2 | length 6.9
  SIGNAL_BOTTOM w0.25: R46.1@102.075,62.6 104.281,62.6 105.181,63.5 SD1.2@108.6,63.5
PMODE0: R28.1 SW3.1 U4.45 | length 34.9
  SIGNAL_TOP w0.295: U4.45@46.98,77.75 48.45,77.75 54.5,83.8 54.5,101.236 55.698,102.434 55.698,102.441 56.115,102.858 SW3.1@56.77,102.858
  SIGNAL_TOP w0.4: SW3.1@56.77,102.858 57.027,102.858 57.392,103.223 R28.1@57.392,106.909
PMODE1: R27.1 SW3.2 U4.44 | length 36.8
  SIGNAL_TOP w0.295: U4.44@46.98,77.25 48.75,77.25 55.1,83.6 55.1,99.296 55.698,99.894 55.698,99.901 56.115,100.318 SW3.2@56.77,100.318
  SIGNAL_TOP w0.4: SW3.2@56.77,100.203 57.31,100.203 57.79,100.683 57.79,100.716 59.817,102.743 R27.1@59.817,106.909
PMODE2: R26.1 SW3.3 U4.43 | length 38.4
  SIGNAL_TOP w0.295: U4.43@46.98,76.75 49.05,76.75 55.728,83.428 55.728,96.973 55.741,96.987 55.741,97.361 56.159,97.778 SW3.3@56.77,97.778
  SIGNAL_TOP w0.4: SW3.3@56.77,97.778 57.425,97.778 57.79,98.143 57.79,98.247 62.23,102.686 R26.1@62.23,106.834
RESET: C30.2 R31.2 SW2.2 U4.37 | length 12.3
  SIGNAL_TOP w0.295: U4.37@46.98,73.75 47.85,73.75 49.034,72.566 49.389,72.566 49.669,72.286 49.669,72.263 C30.2@49.797,72.136 ; C30.2@49.784,72.123 C30.2@50.051,72.39 ; SW2.2@53.467,70.924 SW2.2@53.667,70.724
  SIGNAL_TOP w0.4: C30.2@50.051,72.39 52.451,72.39 53.267,71.574 53.267,71.124 SW2.2@53.467,70.924 ; SW2.2@53.667,70.724 53.667,70.285 55.512,68.44 55.512,67.863 R31.2@55.7,67.675
RO1: U5.1 U6.7 | length 3.6
  SIGNAL_TOP w0.381: U6.7@109.982,47.594 110.024,47.552 110.024,46.567 110.363,46.228 110.871,46.228 111.143,45.956 111.143,44.972 U5.1@111.252,44.862
RO2: U8.7 U10.1 | length 3.6
  SIGNAL_TOP w0.3: U8.7@93.726,47.594 93.783,47.537 93.783,46.425 93.98,46.228 94.488,46.228 94.846,45.87 94.846,45.012 U10.1@94.996,44.862
RTS: Q6.2 R79.1 U16.14 | length 4.3
  SIGNAL_TOP w0.4: U16.14@49.359,40.386 50.94,40.386 51.185,40.631 51.185,40.656 51.41,40.881 R79.1@51.435,40.881 51.483,40.833 Q6.2@53.423,40.833
RX1_RS485: U6.2 U15.32 | length 46.1
  SIGNAL_TOP w0.4: U15.32@69.312,53.761 69.397,53.846 69.397,54.919 72.771,58.293 106.299,58.293 109.982,54.61 U6.2@109.982,53.244
RX2_RS485: U8.2 U15.38 | length 20
  SIGNAL_TOP w0.4: U15.38@76.932,53.761 77.017,53.846 77.017,54.792 77.978,55.753 92.583,55.753 93.726,54.61 U8.2@93.726,53.244
RX_N: R18.1 U4.5 | length 7.1
  SIGNAL_TOP w0.295: U4.5@43.55,80.68 43.55,85.788 R18.1@44.95,87.187
RX_P: R22.1 U4.6 | length 6.6
  SIGNAL_TOP w0.295: R22.1@42.918,87.187 43.05,87.055 U4.6@43.05,80.68
SD_CD: SD1.CD U15.10 | length 42.7
  SIGNAL_TOP w0.4: v2(68.042,69.753) U15.10@68.042,71.261
  SIGNAL_BOTTOM w0.3: v2(68.042,69.753) 99.369,69.753 100.816,71.2 SD1.CD@108.6,71.2
SD_CS: R36.2 R46.2 U15.14 | length 53.7
  SIGNAL_TOP w0.3: U15.14@62.962,71.261 63.112,71.111 63.112,69.78 v2(63.17,69.723) ; v2(103.708,63.652) 103.683,63.678 103.715,63.71 111.535,63.71 R36.2@111.625,63.8 R36.2@111.55,63.8
  SIGNAL_BOTTOM w0.3: v2(63.17,69.723) 66.091,66.802 96.373,66.802 100.525,62.65 R46.2@100.525,62.625 ; R46.2@100.525,62.6 R46.2@100.525,62.625 ; v2(103.708,63.652) 103.657,63.703 101.603,63.703 R46.2@100.525,62.625
SD_MISO: R37.2 R45.2 U15.11 | length 47.4
  SIGNAL_TOP w0.3: v2(103.759,70.155) 104.331,70.727 R37.2@111.527,70.727
  SIGNAL_TOP w0.4: v2(66.751,69.723) 66.762,69.733 66.762,71.257 66.766,71.261 U15.11@66.772,71.261
  SIGNAL_BOTTOM w0.3: v2(66.751,69.723) 67.474,69 R45.2@100.525,69 100.525,69.025 101.655,70.155 v2(103.759,70.155)
SD_MOSI: R40.2 R43.2 U15.13 | length 51.6
  SIGNAL_TOP w0.3: v2(103.708,65.761) 104.048,66.1 R40.2@111.625,66.1
  SIGNAL_TOP w0.4: U15.13@64.232,71.261 64.234,71.259 64.234,69.725 v2(64.237,69.723)
  SIGNAL_BOTTOM w0.3: v2(64.237,69.723) 66.472,67.488 97.837,67.488 R43.2@100.525,64.8 ; R43.2@100.525,64.75 R43.2@100.525,64.8 ; v2(103.708,65.761) 101.486,65.761 R43.2@100.525,64.8
TX1_RS485: U6.3 U15.33 | length 42.9
  SIGNAL_TOP w0.4: U15.33@70.582,53.761 70.667,53.846 70.667,54.792 73.533,57.658 105.642,57.658 108.712,54.588 U6.3@108.712,53.244
TX2_RS485: U8.3 U15.39 | length 16.9
  SIGNAL_TOP w0.4: U15.39@78.202,53.761 78.232,53.791 78.232,54.884 78.466,55.118 91.694,55.118 92.456,54.356 U8.3@92.456,53.244
TX_N: R23.1 U4.1 | length 10.9
  SIGNAL_TOP w0.295: U4.1@45.55,80.68 45.55,81.75 49,85.2 50.97,85.2 52.964,87.195 R23.1@53.145,87.195
TX_P: R24.1 U4.2 | length 9.5
  SIGNAL_TOP w0.295: U4.2@45.05,80.68 45.05,82.15 48.7,85.8 49.575,85.8 R24.1@51,87.225
VBAT: U14.14 VBAT1.P | length 58.3
  SIGNAL_BOTTOM w0.6: v2(86.39,63.07) 86.39,62.962 89.027,60.325 114.825,60.325 116.637,62.137 116.637,75.826 108.306,84.157 108.306,84.607 VBAT1.P@108.204,84.709
VBUS: C50.2 C51.2 D5.1 D6.5 USB1.A4 USB1.B4 | length 31.4
  SIGNAL_TOP w0.254: D6.5@41.001,37.211 v1(42.418,37.211)
  SIGNAL_TOP w0.3: USB1.B4@34.826,34.89 USB1.B4@34.925,34.791
  SIGNAL_TOP w0.35: USB1.B4@34.826,34.89 33.944,34.89 33.02,35.814 33.02,38.661 33.87,39.511 34.76,39.511 USB1.A4@34.861,39.613
  SIGNAL_TOP w0.55: USB1.A4@34.861,39.613 36.438,39.613 v1(37.719,40.894)
  SIGNAL_TOP w0.6: D5.1@30.48,44.7 30.48,43.815 31.495,42.8 36.05,42.8 C51.2@37.719,44.469 ; C50.2@37.706,42.291 C50.2@37.719,42.278 ; v1(37.719,40.894) C50.2@37.719,42.278 ; C51.2@37.719,44.5 C51.2@37.719,44.469 ; C51.2@37.725,44.5 37.725,44.475 C51.2@37.719,44.469 ; C50.2@37.719,42.278 C51.2@37.719,44.469
  SIGNAL_BOTTOM w0.4: v1(37.719,40.894) 38.789,40.894 42.318,37.365 42.418,37.265 v1(42.418,37.211)
VIN: DC1.1 R1.1 SW1.2 | length 38.6
  SIGNAL_TOP w1.3: DC1.1@112.7,95.6 112.7,92.4 113.6,91.5 120.5,91.5 122.6,89.4 122.6,83.699 121.831,82.93 119.63,82.93 SW1.2@119.4,82.7
  SIGNAL_BOTTOM w0.6: DC1.1@112.7,95.6 112.7,101.9 113.2,102.4 119.825,102.4 120.475,101.75 120.525,101.75 120.725,101.55 R1.1@120.725,101.5
Vo: LCD1.3 VR1.2 | length 4.7
  SIGNAL_TOP w0.4: VR1.2@108.051,108.839 108.051,106.528 108.712,105.867 LCD1.3@108.712,104.394
XI: C29.2 R29.1 U4.30 X1.3 | length 16.7
  SIGNAL_TOP w0.28: C29.2@39.1,59.725 39.246,59.579 41.498,59.579 X1.3@41.644,59.433 41.97,59.76 42.26,59.76 42.8,60.3 42.8,62.6 42.417,62.983 42.417,62.998 42.315,63.1 42.3,63.1 42.125,63.275 R29.1@42.125,63.4 42.125,63.51 42.55,63.935 U4.30@42.55,72.32
XO: C28.2 R29.2 U4.31 X1.1 | length 14.2
  SIGNAL_TOP w0.295: U4.31@43.05,72.32 43.05,64.025 R29.2@43.675,63.4 ; X1.1@43.675,61.005 R29.2@43.675,63.4 ; X1.1@43.944,61.233 43.986,61.275 C28.2@46.6,61.275
pads on no net: COM1. COM1.7 EN1.SH1 EN1.SH2 LCD1.7 LCD1.8 LCD1.9 LCD1.10 LCD1.S3 LCD1.S4 MH1.1 MH2.1 MH3.1 MH4.SS SD1. SD1.1 SD1.8 SW1.3 SW8.S1 SW8.S2 U1.2 U1.3 U4.7 U4.12 U4.13 U4.18 U4.23 U4.24 U4.26 U4.38 U4.39 U4.40 U4.41 U4.42 U4.46 U4.47 U14.1 U14.3 U14.4 U14.5 U14.6 U14.7 U14.8 U14.9 U14.10 U14.11 U14.12 U15.41_5 U16.7 U16.8 U16.9 U16.10 U16.11 U16.12 U16.15 USB1.A8 USB1.B8

## Polygon pours and split planes (outlines as drawn)
GND on SIGNAL_TOP "GND_L01_P010" (solid, remove dead copper, pour order 10): 84.201,15.882 84.201,46.965 88.636,51.4 115.713,51.4 116.738,50.375 116.738,44.062 117.587,43.213 123.9,43.213 123.9,107.7 120.3,111.3 29.7,111.3 25.8,107.4 25.8,20.2 30.1,15.9 30.1,15.7
GND_RS485 on SIGNAL_TOP "GND_RS485_L01_P011" (solid, pour order 11): 86.6,16.065 86.6,44.969 90.831,49.2 114.9,49.2 114.9,42.2 116.7,40.4 123.9,40.4 123.9,19.6 120.3,16
GND_RS485 on SIGNAL_BOTTOM "GND_RS485_L04_P012" (solid, pour order 12): 86.6,16.065 86.6,45.6 90,49 115.5,49 115.5,41.6 116.7,40.4 123.9,40.4 123.9,19.6 120.3,16
GND on SIGNAL_BOTTOM "GND_L04_P008" (solid, pour order 8): 29.3,111.2 25.8,107.7 25.8,19.7 29.8,15.7 84.8,15.7 84.8,47 89.5,51.7 116,51.7 116.9,50.8 116.9,44 117.9,43 123.9,43 123.9,108.1 120.9,111.1 117.9,111.1
GND on GND "GND_L02_P009" (solid, pour order 9): 84.8,15.898 84.8,47 89.5,51.7 116,51.7 116.9,50.8 116.9,43.9 117.728,43.072 123.9,43.072 123.9,108.1 120.9,111.1 29.2,111.1 25.8,107.7 25.8,19.4 29.5,15.7 29.8,15.7
GND_RS485 on GND "GND_RS485_L02_P013" (solid, pour order 13): 86.6,16.065 86.6,45.6 90,49 114.9,49 114.9,42.2 116.7,40.4 123.9,40.4 123.9,19.6 120.3,16
GND on POWER "GND_L03_P002" (solid, pour order 2): 110.313,73.152 110.313,60.833 62.586,60.833 61.213,62.205 61.213,71.246 63.119,73.152

## Keep-outs
Keep-Out Layer:
  the board outline again, w0.15

## Other copper
SIGNAL_TOP:
  region net +VCC: 99.441,93.267 101.649,93.267 101.981,93.599 101.981,95.377 106.172,95.377 107.61,93.939 107.61,86.487 105.9,86.487 105.9,92.874 105.048,93.726 103.378,93.726 103.378,92.202 101.981,92.202 101.528,92.655 99.441,92.655
  region net +VCC: 110.261,79 114.6,79 114.6,83.2 110.6,83.2 106.731,87.069 106.731,90.348 104.902,90.348 104.902,86.698 110.261,81.339
  region net NetC5_2: 91.973,93.218 91.973,96.926 92.964,97.917 94.336,97.917 94.767,98.349 98.374,98.349 98.958,97.765 98.958,95.809 99.466,95.301 99.466,93.821 101.401,93.821 101.401,98.243 99.898,99.746 92.634,99.746 89.459,96.571 87.401,96.571 87.401,93.218
  region net NetC5_2: 101.117,93.904 101.244,94.031 101.244,97.587 98.958,97.587 98.958,96.063 99.212,96.063 99.593,95.682 99.593,93.904
  region net +3.3V: 96.266,82.55 96.266,81.854 93.03,81.854 91.313,80.137 91.313,77.851 83.947,77.851 83.566,77.47 80.874,77.47 80.874,81.026 85.344,81.026 86.868,82.55
  region net NetD1_2: 86.487,86.411 91.135,86.411 93.726,83.82 97.282,83.82 98.097,83.005 98.097,77.47 95.529,77.47 95.529,79.68 96.545,79.68 96.926,80.061 96.926,83.109 86.487,83.109
  region net +5V: 96.311,84.41 94.615,86.106 94.615,89.332 93.802,89.332 92.202,90.932 80.772,90.932 80.772,87.329 91.502,87.329 94.421,84.41

## Silkscreen, mask and mechanical layers (free items; w line width, h text height)
Top Overlay:
  text "LAN PORT" at 29.205,100.98 h1.3 r270
  text "12 - 24 VDC" at 95.085,100.651 h1.3
  text "5V" at 72.35,94.4 h1.3
  text "1" at 59.5,93.4 h1.3 r90
  text "0" at 64.4,93.35 h1.3 r90
  text "IO3 IO45 IO46" at 56.594,81.777 h1.3 r90
  text "3.3V" at 71.639,77.534 h1.3
  text "3.3V 5V GND GND GND" at 64.544,76.754 h1.3 r90
  text "VCC" at 102.758,74.69 h1.3
  text "GND" at 29.3,53.05 h1.3
  text "GND-485" at 86.906,43.612 h1.3 r270
  text "TYPE-C" at 27.751,40.787 h1.3 r270
  text "GND-485" at 116.07,27.286 h1.3 r270
  text "5V-485" at 119.221,27.181 h1.3 r270
  text "RESET" at 33.4,20.9 h1.3
  text "PORT 1" at 91.4,19.9 h1.3
  text "PORT 2" at 102.3,19.9 h1.3
  text "BOOT" at 33.4,18.4 h1.3
Bottom Overlay:
  drawing of 13 lines, arcs and shapes, not listed
  text "LCD 20x4A" at 107.7,100.5 h1.3
  text "VCC" at 120.791,91.074 h1.3 r270
  text "IOT - GATEWAY" at 112,38.53 h2.5
  text "Version 1.1.0" at 112.1,35.83 h2.5
  text "LAB-209B3" at 111.9,33.03 h2.5
  text "PORT 1" at 111,28.7 h1.3
  text "PORT 2" at 100.6,28.6 h1.3